# Altium PCB Power PCB Ver A.PcbDoc
Units mil, origin at the board's own origin, x right, y up, seen from the top; angles counter-clockwise.
Board outline 2927.17 x 2865.35 mil, 2 copper layers (Top Copper, Bottom Copper), stack 61.7 mil thick; 38 components, 30 nets, 129 pads, 104 vias.
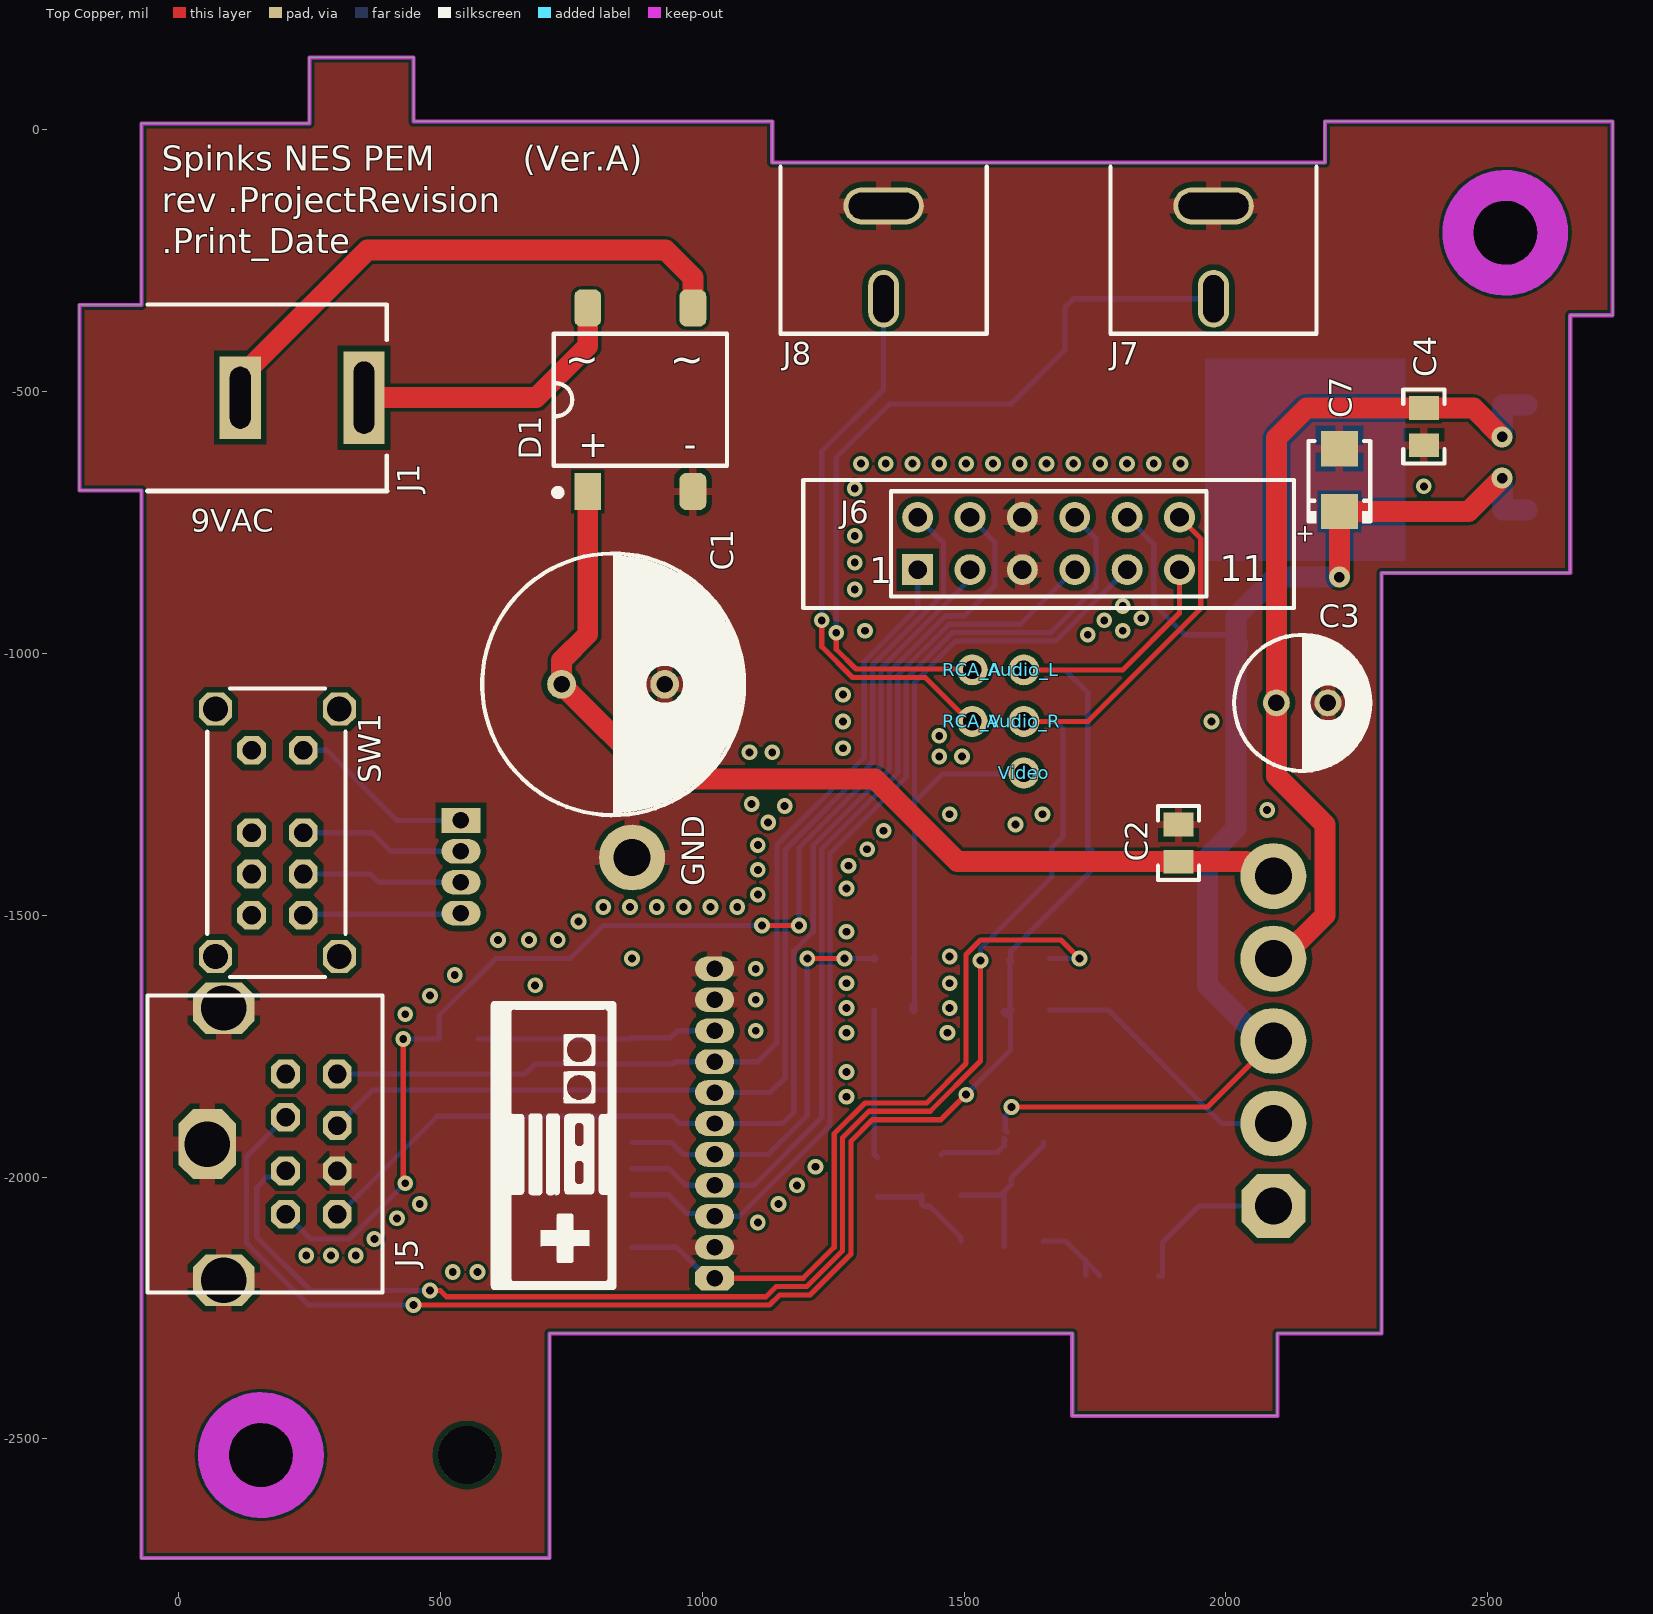
[diagram p0: Top Copper view]
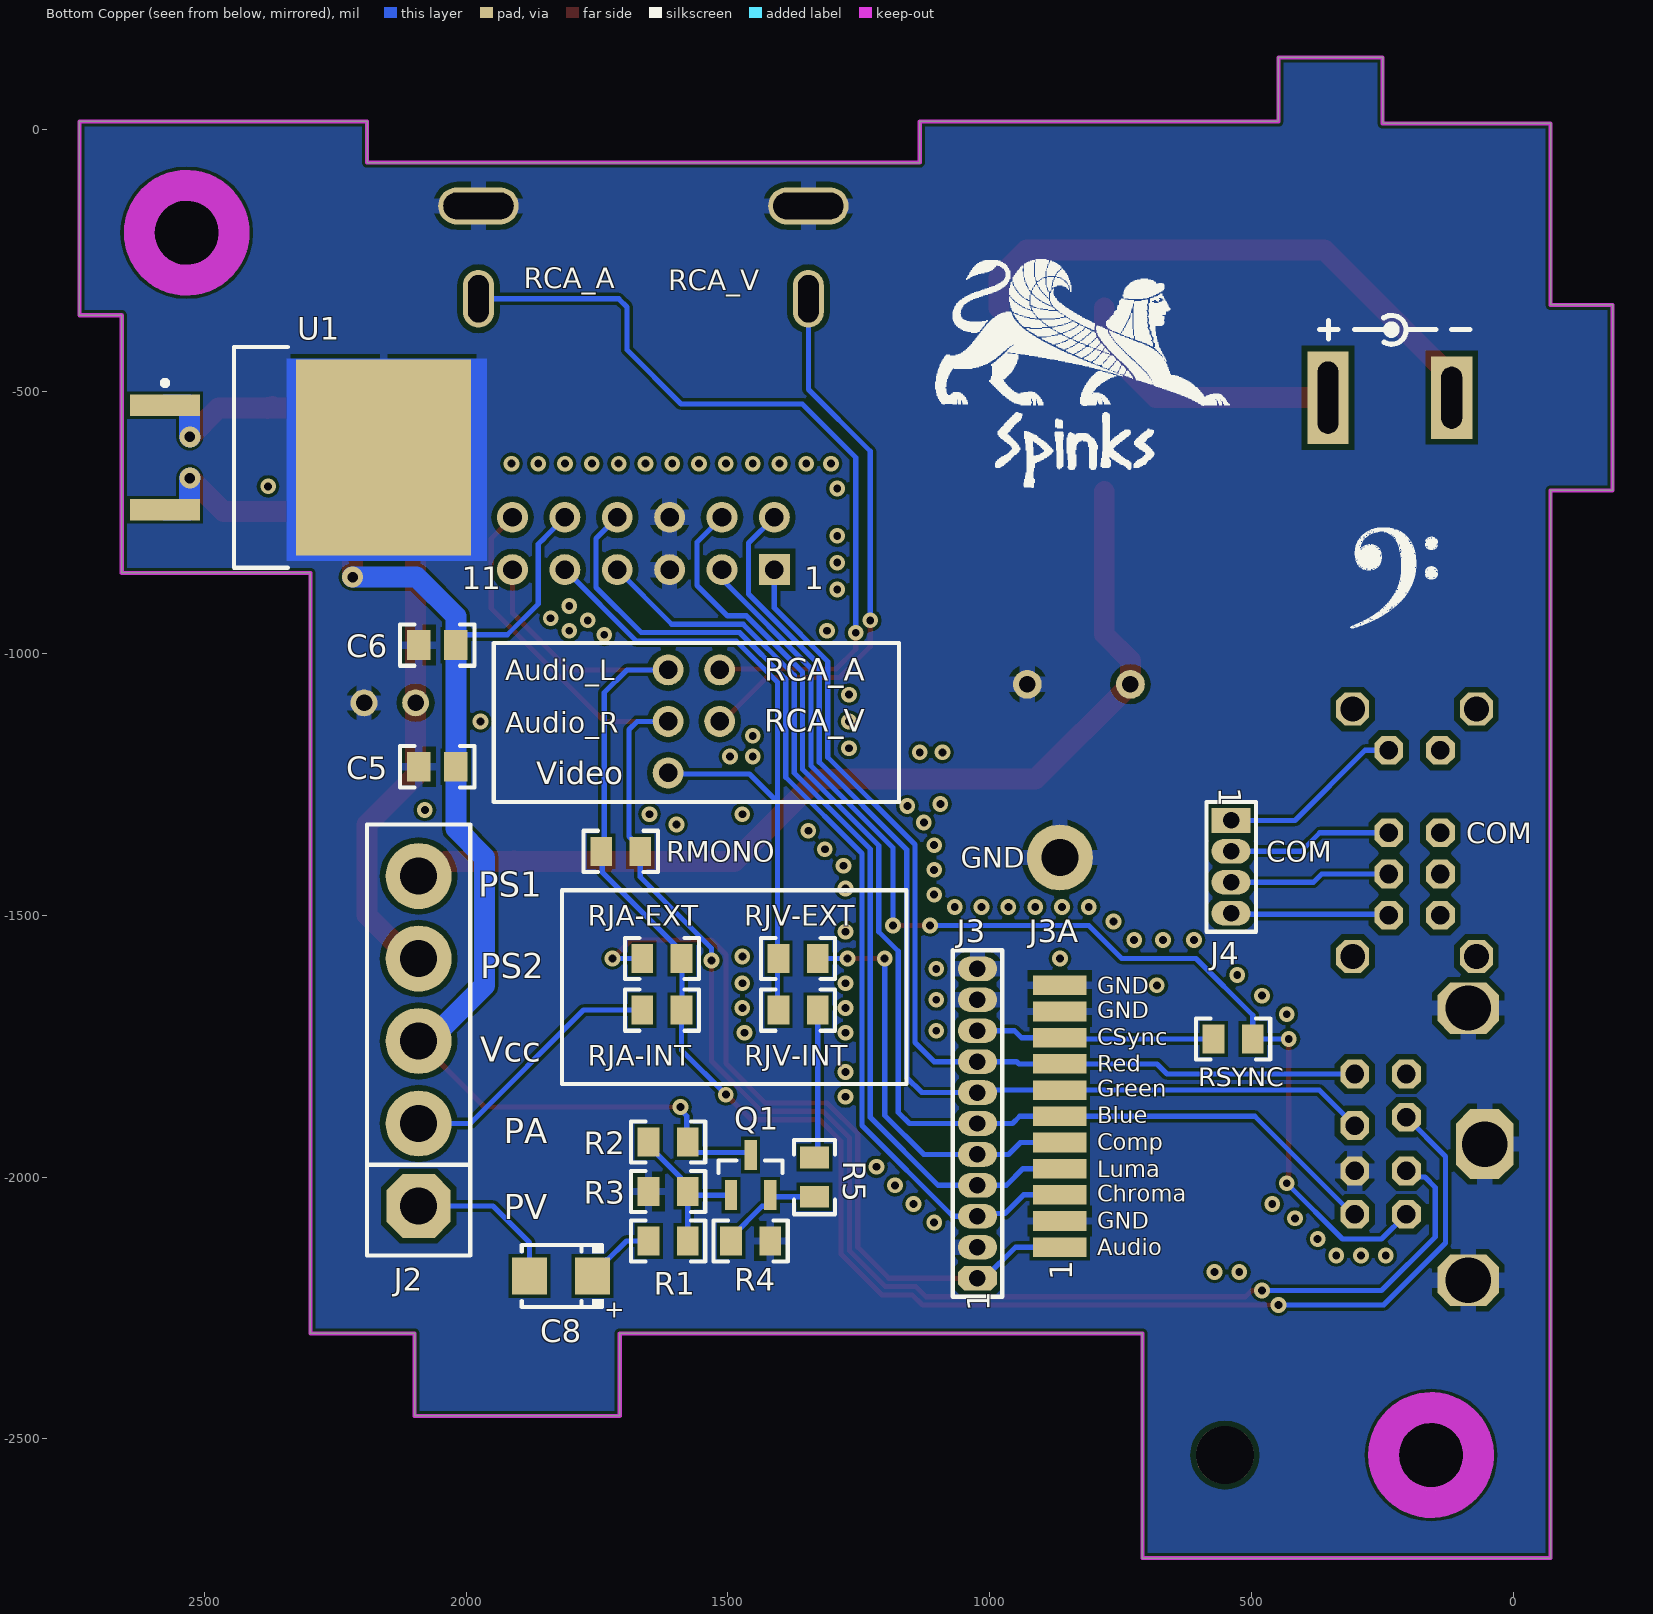
[diagram p1: Bottom Copper view, seen from below]
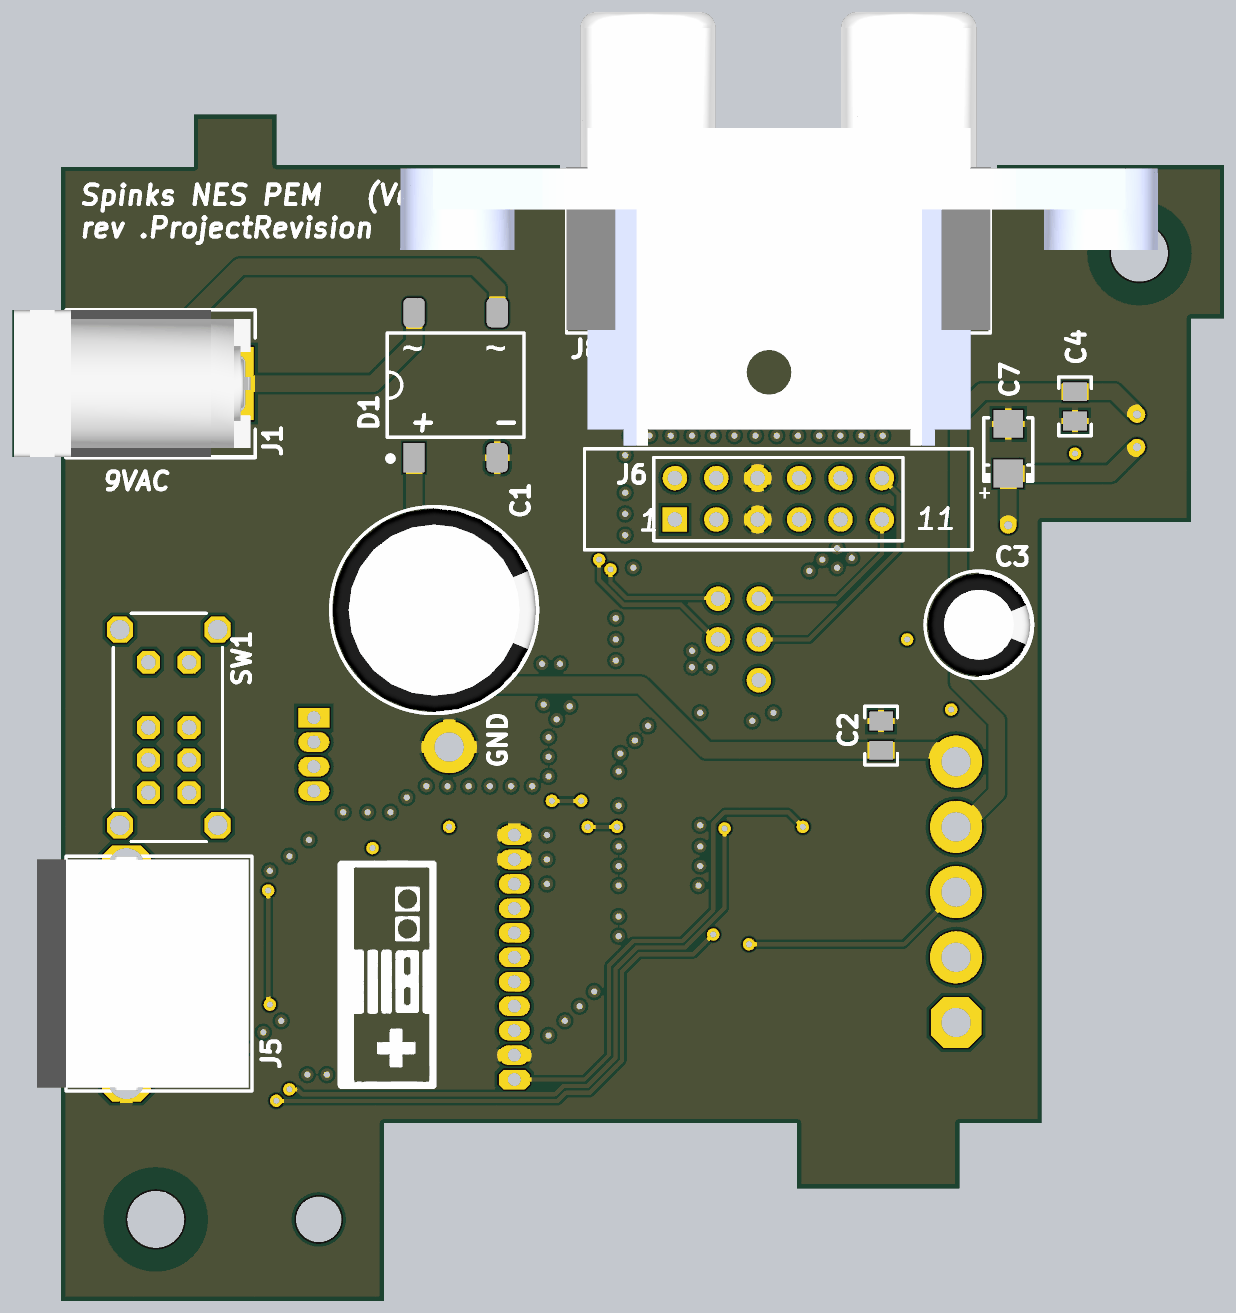
[diagram p2: 3D render of the assembled board from above, using the file's embedded part models]
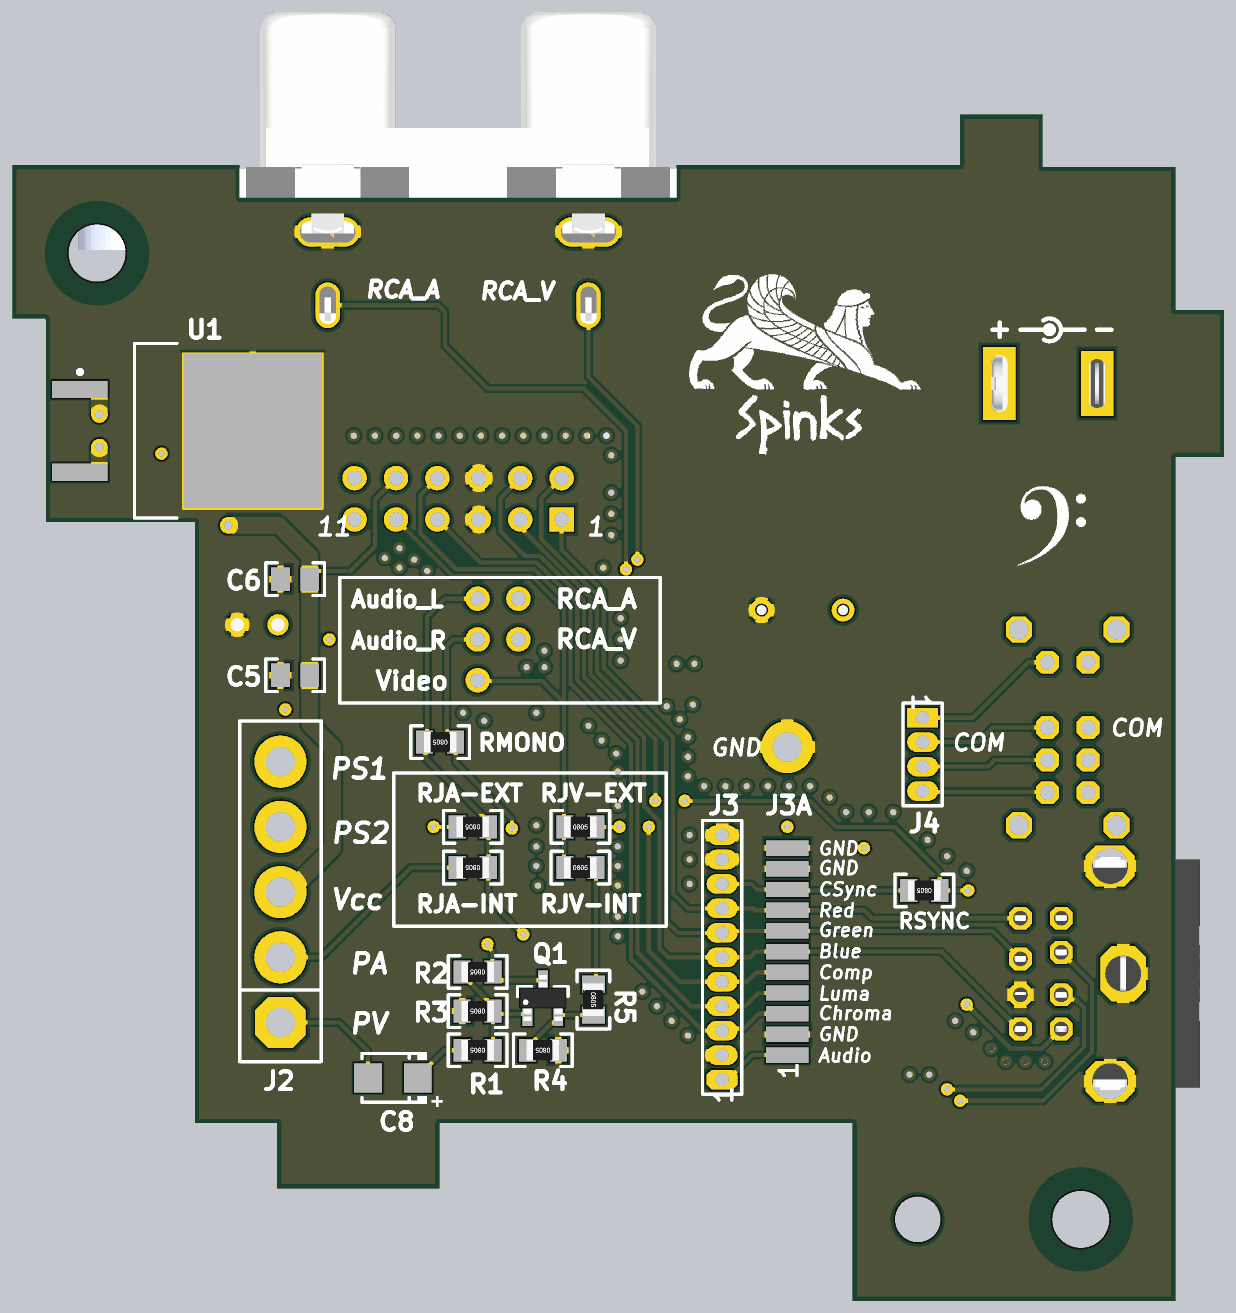
[diagram p3: 3D render of the assembled board from below, using the file's embedded part models]

## Layer stack, top to bottom
Top Solder Mask: solder mask 0.4, Solder Resist, Dk 3.5
Top Copper: signal copper 1.35
Dielectric 1: core 59, FR-4, Dk 4.2
Bottom Copper: signal copper 1.35
Bottom Solder Mask: solder mask 0.4, Solder Resist, Dk 3.5

## Board outline
-188.98,-688.98 -70.87,-688.98 -70.87,-2727.56 708.66,-2727.56 708.66,-2298.43 1706.69,-2298.43 1706.69,-2455.91 2098.43,-2455.91 2098.43,-2298.43 2297.24,-2298.43 2297.24,-846.46 2657.48,-846.46 2657.48,-354.33 2738.19,-354.33 2738.19,15.75 2188.98,15.75 2188.98,-62.99 1133.86,-62.99 1133.86,15.75 448.82,15.75 448.82,137.8 250,137.8 250,11.81 -70.87,11.81 -70.87,-334.65 -188.98,-334.65

## Design rules (kind name [scope] priority, off if disabled: settings)
Clearance [All] p1: gap=6 ignorepadtopadclearanceinfootprint=FALSE except(0: Arc-Hole Track-Hole SMDPad-Hole THPad-Hole Via-Hole Fill-Hole Poly-Hole Region-Hole Text-Hole; 10.5: THPad-Poly THPad-Region)
HoleSize [All] p1: absolutevalues=TRUE maxlimit=100 minlimit=15 maxpercent=80.000 minpercent=20.000
MinimumAnnularRing Via [IsVia] p1: minimumring=5
MinimumAnnularRing "Through Hole" [All] p2: minimumring=7
PolygonConnect "Via To Polygon" [IsVia] p1: connectstyle=Direct reliefconductorwidth=10 reliefentries=4 polygonreliefangle="90 Angle" airgapwidth=10
PolygonConnect "Pad to Polygon" [IsPad AND NOT OnMultiLayer] p2: connectstyle=Relief reliefconductorwidth=15 reliefentries=4 polygonreliefangle="90 Angle" airgapwidth=10
PolygonConnect "Through Hole to Polygon" [IsPad AND OnMultiLayer] p3: connectstyle=Relief reliefconductorwidth=30 reliefentries=4 polygonreliefangle="90 Angle" airgapwidth=10
PolygonConnect [All] p4: connectstyle=Relief reliefconductorwidth=15 reliefentries=4 polygonreliefangle="90 Angle" airgapwidth=10
RoomDefinition "Power Board Schematic Ver A" [InComponentClass('Power Board Schematic Ver A')] p1: confinementstyle=ConfineIn formatcopy=TRUE lockcomponents=FALSE outline -1000,-3727.56 1000,-3727.56 1000,-2727.56 -1000,-2727.56
RoutingVias [All] p1: holewidth=15 width=30 viastyle="Through Hole" minholewidth=15 minwidth=25 maxholewidth=40 maxwidth=64
SilkToSilkClearance [All] p1: silktosilkclearance=1
SolderMaskExpansion [All] p1: expansion=4 istentingtop=FALSE
Width [All] p1: maxlimit=200 minlimit=6 preferedwidth=10
28 further rules are at their usual default settings.

## Components (designator, comment, footprint, x,y, rotation, side; value= is the part's Value field where it differs from the comment)
Audio_L "Wire Pad" WIREPAD-09-15#1 1614.17,-1031.5 r180 top
Audio_R "Wire Pad" WIREPAD-09-15#1 1614.17,-1129.92 r90 top
C1 "Cap Aluminum" "TH CAP-12.5X25MM-A1K2" 830,-1059.06 r0 top value=2200uF
C2 "Cap Ceramic" "CAP 0805_N" 1909.45,-1362.2 r270 top value=10nF
C3 "Cap Aluminum" "TH CAP-6.3X11MM-A1K2" 2145.67,-1094.49 r0 top value=100uF
C4 "Cap Ceramic" "CAP 0805_N" 2377.95,-566.93 r90 top value=10nF
C5 "Cap Ceramic" "CAP 0805_N" 2055.12,-1216.54 r180 bottom value=10nF
C6 "Cap Ceramic" "CAP 0805_N" 2055.12,-984.25 r180 bottom value=0.1uF
C7 "Cap Tantalum" "CAP EIA-A (3216) A1K2" 2216.54,-669.29 r90 top value=10uF
C8 "Cap Tantalum" "CAP EIA-A (3216) A1K2" 1818.9,-2188.98 r0 bottom value=10uF
D1 "DF206-ST" DFS4 881.89,-515.75 r90 top
GND "Wire Pad" WIREPAD-09-15#2 866.14,-1389.76 r90 top
J1 "PJ-037A" "PWR-JCK (PJ-037A/B)" 118.11,-511.81 r0 top locked
J2 "RF Board Connector" "RF BOARD CONNECTOR" 2090.55,-2055.12 r90 bottom locked
J3 "1.27mm Pitch" "HDR1x11-15MM VERTL - L" 1023.62,-2192.91 r90 bottom
J3A "1.27mm Pitch" SMD1x11-127MM 866.14,-2133.86 r90 bottom
J4 "Header 1x4 1.27mm" "HDR1X4-15MM VERT - L" 539.37,-1318.9 r270 bottom
J5 "MD-80SM" "MINI-DIN-8-ALT (MD-80SM)" -129.92,-1937.01 r90 top locked
J6 "Multiout" MULTIOUT-2 1661.42,-653.54 r180 top locked
J7 "RCJ-042" "RCA-JCK-1 (RCJ-042)" 1976.38,-145.67 r180 top locked
J8 "RCJ-042" "RCA-JCK-1 (RCJ-042)" 1346.46,-145.67 r180 top locked
Q1 "Transistor NPN" SOT23-3 1456.69,-1996.06 r90 bottom value=BC817
R1 "Resistor" "RES 0805_N" 1614.17,-2122.05 r0 bottom value=330
R2 "Resistor" "RES 0805_N" 1614.17,-1933.07 r0 bottom value=5.6k
R3 "Resistor" "RES 0805_N" 1614.17,-2027.56 r0 bottom value=330
R4 "Resistor" "RES 0805_N" 1456.69,-2122.05 r0 bottom value=560
R5 "Resistor" "RES 0805_N" 1334.65,-2000 r270 bottom value=75
RCA_A "Wire Pad" WIREPAD-09-15#1 1515.75,-1031.5 r180 top
RCA_V "Wire Pad" WIREPAD-09-15#1 1515.75,-1129.92 r180 top
RJA-EXT "Resistor" "RES 0805_N" 1625.98,-1582.68 r0 bottom value=NA
RJA-INT "Resistor" "RES 0805_N" 1625.98,-1681.1 r0 bottom value=0
RJV-EXT "Resistor" "RES 0805_N" 1366.14,-1582.68 r180 bottom value=NA
RJV-INT "Resistor" "RES 0805_N" 1366.14,-1681.1 r180 bottom value=0
RMONO "Resistor" "RES 0805_N" 1704.72,-1377.95 r0 bottom value=0
RSYNC "Resistor" "RES 0805_N" 535.43,-1736.22 r0 bottom value=470
SW1 "DP3T" "SW-DP3T (EG2319)" 188.98,-1342.52 r270 top locked value=EG2319
U1 "L7805ABD2T" "D2PAK (TO-263)" 2318.9,-625.98 r180 bottom
Video "Wire Pad" WIREPAD-09-15#1 1614.17,-1228.35 r180 top

## Footprints (in the part's own frame and the unit in brackets; to place one, negate y for a bottom-side part, rotate by r counter-clockwise, add the part's x,y. Pads: shape width x height; smd on the part's side, far side on the other; paste and mask are expansions set on the pad)
"CAP 0805_N" [mm] "Chip Capacitor, Body 2.0x1.2mm, Height 0.75mm, IPC Medium Density"
  rect 1.15x1.45 smd: 1(-0.9,0) 2(0.9,0)
  silkscreen extent -1.8,-1 1.8,1, body extent -1.1,-0.72 1.1,0.73, height 0.75
"CAP EIA-A (3216) A1K2" [mm] "Molded Capacitor, 2-Leads, Body 3.20x1.60mm, IPC Medium Density"
  rect 1.7x1.8 smd: 1(-1.525,0) 2(1.525,0)
  silkscreen extent -2.1,-1.5 1.9,1.5, body extent -1.7,-0.9 1.7,0.9, height 1.9
"D2PAK (TO-263)" [mm] "D2-PAK, 3-Leads, Body 8.9x10.2mm, 3 Pads, Pitch 2.54mm, Lead Span 15.2mm, IPC Medium Density"
  rect 3.4x1.05 smd: 1(-6.5,2.54) 3(-6.5,-2.54)
  rect 8.5x9.5 smd: 4(4.1,0)
  silkscreen extent -6.63,-5.35 -0.55,5.35, body extent -3.15,-5.33 6.5,5.33, height 4.83
DFS4 [mm]
  rect 1.8x1.3 smd: 1(-4.45,2.55)
  rrect50% 1.8x1.3 smd: 2(-4.45,-2.55) 3(4.45,-2.55) 4(4.45,2.55)
  silkscreen extent -4.62,-4.2 3.2,4.2, body extent -3.25,-4.25 3.25,4.25, height 2.6
"HDR1X4-15MM VERT - L" [mm] "Connector; Header; 4 Position; 1.5mm Pitch;Vertical Mount"
  rect 1.2x1.9 hole 0.8: 1(0,0)
  oval 1.2x1.9 hole 0.8: 2(1.5,0) 3(3,0) 4(4.5,0)
  silkscreen extent -0.9,-1.2 5.4,1.2
"HDR1x11-15MM VERTL - L" [mm] "Connector; Header; 11 Position; 1.5mm Pitch"
  oct 1.2x1.9 hole 0.8: 1(0,0)
  oval 1.2x1.9 hole 0.8: 2(1.5,0) 3(3,0) 4(4.5,0) 5(6,0) 6(7.5,0) 7(9,0) 8(10.5,0) 9(12,0) 10(13.5,0) 11(15,0)
  silkscreen extent -0.9,-1.2 15.9,1.2
"MINI-DIN-8-ALT (MD-80SM)" [mm] "CUI Inc, Mini Din Connector, Through Hole, Right Angle"
  oct 1.4x1.4 hole 0.9: 1(-1.3,-8.5) 2(1.3,-8.5) 3(-3.4,-8.5) 4(-1.3,-11) 5(3.4,-8.5) 6(-3.4,-11) 7(0.9,-11) 8(3.4,-11)
  oct 2.5x3 hole 2.2: SHLD(-6.6,-5.5) SHLD(6.6,-5.5)
  oct 3.4x2.8 hole 2.2: SHLD(0,-4.7)
  silkscreen extent -7.2,-13.2 7.2,-1.8, body extent -7.17,-13 7.17,0, height 12.8
MULTIOUT-2 [mm] "Retrofixes Mutliout Connector, Panel Mount with Through Holes"
  rect 1.5x1.5 hole 0.9 paste+0: 1(6.35,4.74)
  round 1.5 hole 0.9 paste+0: 2(6.35,2.2) 3(3.81,4.74) 4(3.81,2.2) 5(1.27,4.74) 6(1.27,2.2) 7(-1.27,4.74) 8(-1.27,2.2) 9(-3.81,4.74) 10(-3.81,2.2) 11(-6.35,4.74) 12(-6.35,2.2)
  silkscreen extent -11.9,0.4 11.9,6.6, body extent -23.3,-19.29 23.2,0.21, height 14.55
"PWR-JCK (PJ-037A/B)" [mm] "DC Power Jack; 2.1mm ID, 6.5mm OD; No Switch"
  rect 2x4.5 hole 1 slot 3.5 at 90 deg: 1(6,0)
  rect 2x4 hole 1 slot 3 at 90 deg: 2(0,0)
  body extent -7.7,-4.5 6.8,4.5, height 11.02
"RCA-JCK-1 (RCJ-042)" [mm] "RCA Phono Jack, Right Angle"
  oval 3.9x1.8 hole 1.3 slot 3.4 at 0 deg: 1(0,0)
  oval 1.5x2.8 hole 1 slot 2.3 at 90 deg: 2(0,4.5)
  silkscreen extent -5,-1.9 5,6.2, body extent -5,-13.5 5,6, height 11.51
"RES 0805_N" [mm] "Chip Resistor, Body 2.0x1.3mm, IPC Medium Density"
  rect 1.05x1.4 smd: 1(-0.95,0) 2(0.95,0)
  silkscreen extent -1.8,-1 1.8,1, body extent -1,-0.62 1,0.63, height 0.62
"RF BOARD CONNECTOR" [mm] "connects the motherboard to the RF/power box"
  oct 3.1x3.1 hole 1.8 paste+0: 1(0,0)
  round 3.2 hole 1.8 paste+0: 2(4,0) 3(8,0) 4(12,0) 5(16,0)
  silkscreen extent -2.4,-2.5 18.5,2.5
SMD1x11-127MM [mm] "Connector; Header; 11 Position; 1.27mm Pitch"
  rect 0.95x2.6 smd: 1(0,0) 2(1.27,0) 3(2.54,0) 4(3.81,0) 5(5.08,0) 6(6.35,0) 7(7.62,0) 8(8.89,0) 9(10.16,0) 10(11.43,0) 11(12.7,0)
SOT23-3 [mm] "SOT23, 3-Leads, Body 2.90x2.35mm, Pitch 0.95mm, IPC Medium Density"
  rect 1.45x0.6 smd: 1(-0.975,0.95) 2(-0.975,-0.95) 3(0.975,0)
  silkscreen extent 0.1,-1.55 0.7,1.55, body extent -1.4,-1.45 1.4,1.45, height 1.3
"SW-DP3T (EG2319)" [mm] "E-Switch; DP3T Slide Switch; PCB Mount Right Angle"
  oct 1.4x1.4 hole 0.9: 1(-4,-1.25)
  oct 1.4x1.4 hole 0.9 paste+0: 2(0,-1.25) 3(2,-1.25) 4(4,-1.25) 5(-4,1.25) 6(0,1.25) 7(2,1.25) 8(4,1.25)
  oct 1.6x1.6 hole 1.2: MH(-6,3) MH(-6,-3) MH(6,3) MH(6,-3)
  silkscreen extent -7,-3.4 7,3.3, body extent -6.9,-11.75 6.9,3.25, height 8.5
"TH CAP-6.3X11MM-A1K2" [mm] "Aluminum Electrolytic Capacitor, Diameter 6.3mm, Height 11mm, Pitch 2.5mm"
  round 1.3 hole 0.8: 1(-1.25,0) 2(1.25,0)
  silkscreen extent -3.3,-3.3 3.3,3.3, body extent -3.15,-3.15 3.16,3.15, height 11.21
"TH CAP-12.5X25MM-A1K2" [mm] "Aluminum Electrolytic Capacitor, Diameter 12.5mm, Height 25mm, Pitch 5.0mm"
  round 1.4 hole 0.8: 1(-2.5,0) 2(2.5,0)
  silkscreen extent -6.35,-6.35 6.35,6.35, body extent -6.25,-6.25 6.26,6.25, height 25.01
WIREPAD-09-15#1 [mm] "Connector; Through Hole Pad; 0.9mm Inner, 1.5mm Outer"
  round 1.5 hole 0.9: 1(0,0)
WIREPAD-09-15#2 [mm] "Connector; Through Hole Pad; 0.9mm Inner, 1.5mm Outer"
  round 3.2 hole 1.8: 1(0,0)

## Part data
Audio_L Audio_R GND RCA_A RCA_V Video: library part "-Wire Pad", "Wire Pad, 1 Pin, Through Hole, Vertical"
C1: library part "TH-ALUM-8-22-25V (ECA-1EHG222)", "CAP, ALUM, TH, 12.5x25mm, 2200uF, 25V, 20%, Pitch 5.0mm", Supplier Part Number 1=667-ECA-1EHG222, Voltage=25V, ReferencePart=ECA-1EHG222, Supplier 1=Mouser
C2 C4 C5: library part 0603-X7R-3-10-50V, "CAP, CER, 0805, 10nF, 50V, X7R, 10%", Voltage=50V, ReferencePart=VJ0603Y103KXACW1BC
C3: library part "TH-ALUM-7-10-25V (ECA-1EM101)", "CAP, ALUM, TH, 6.3x11mm, 100uF, 25V, 20%, Pitch 2.5mm", Supplier Part Number 1=667-ECA-1EM101, Voltage=25V, ReferencePart=ECA-1EM101, Supplier 1=Mouser
C6: library part 0805-X7R-4-10-50V, "CAP, CER, 0805, 0.1uF, 50V, X7R, 10%", Voltage=50V, ReferencePart=VJ0805Y104KXXCW1BC
C7 C8: library part "1206-TANT-6-10-16V (TAJA106K016RNJ)", "CAP, TANT,  1206, 10uF, 16V, 10%", Supplier Part Number 1=581-TAJA106K016R, Voltage=16V, Supplier 1=Mouser
D1: library part "Bridge (DF206-ST)", "Full Wave Diode Bridge", Supplier Part Number 1=750-DF206ST-G, Supplier 1=Mouser
J1: library part "PWR-JCK (PJ-037A)", "2.1mm ID, DC Power Supply Connector, 2 Pin", Supplier Part Number 1=490-PJ-037A, Supplier 1=Mouser
J2: "Motherboard Connector to RF/Power Module"
J3: library part "RF Board Mod Input Header", "Video and audio inputs for the RF Board Mod"
J3A: library part "RF Board Mod Input Header_1", "Video and audio inputs for the RF Board Mod"
J4: library part "Header 1x4 - 1.5mm Vert", "Header, 4 Pin, 1.5mm Pitch, Vertical"
J5: library part "Mini-XRGB (MD-80SM)", "8 Pin Mini DIN Connector, Shielded, Through Hole, Right Angle", Supplier Part Number 1=490-MD-80SM, Supplier 1=Mouser
J6: library part "Multiout Connector", "SNES Multiout Connector"
J7 J8: library part "RCA-JCK-1 (RCJ-042)", "RCA Phono Jack, Right Angle", Supplier Part Number 1=490-RCJ-042, Supplier 1=Mouser
Q1: library part "BC817 NPN", "General Purpose Transistor, NPN, 3-Pin, B1E2C3", Supplier Part Number 1=863-BC817-40LT1G, Supplier 1=Mouser
R1 R2 R3 R4 R5 RJA-EXT RJA-INT RJV-EXT RJV-INT RMONO RSYNC: library part -Resistor, "RES, SMD"
SW1: library part "SW-DP3T (EG2319)", "Dual Pole, Three Throw", Supplier Part Number 1=612-EG2319, Supplier 1=Mouser
U1: "Fixed 5V Regulator, 1.5A, D2PAK", Supplier Part Number 1=511-L7805ABD2T-TR, Supplier 1=Mouser

## Free pads (board coordinates)
  round 137.8 hole 137.8 unplated paste+0: MH(157.48,-2530.71) MH(2533.46,-196.85)
  round 110.24 hole 110.24 unplated paste+0: MH(551.18,-2530.71)

## Via types
v1: diameter 30, hole 15, Top Copper to Bottom Copper, tented both sides, 82 vias
v2: diameter 30, hole 15, Top Copper to Bottom Copper, 19 vias
v3: diameter 40, hole 20, Top Copper to Bottom Copper, 3 vias

## Nets (pads, with @x,y where several pads share a name; then routed paths per layer and width w, separated by ;. In a path a pad name is that pad's centre, name@x,y a point inside that pad or via, vN(x,y) a via of type N, cw(c..) or ccw(c..) an arc to the next point about the centre after c; other vN are vias at no path point)
+5V: C5.2 C6.2 C7.1 J2.3 J6.10 Q1.3 R2.1 U1.3 | length 2877.6
  Top Copper w10: v2(1590.55,-1866.14) 1964.57,-1866.14 J2.3
  Top Copper w15: C7.1@2218.5,-729.33 C7.1@2244.47,-703.37
  Top Copper w20: J6.10 J6.10@1811.42,-728.58
  Top Copper w40: v3(2216.54,-854.33) C7.1 2218.5,-729.33 2463.58,-729.33 v3(2527.56,-665.35)
  Bottom Copper w10: Q1.3 1456.69,-1957.44 1461,-1953.13 1563.6,-1953.13 1576.77,-1939.96 R2.1 ; R2.1@1576.77,-1926.18 R2.1 ; R2.1@1578.74,-1931.1 R2.1 ; R2.1@1582.68,-1913.39 1581.61,-1913.39 1578.74,-1910.51 1578.74,-1883.36 1590.55,-1871.55 v2(1590.55,-1866.14) ; J6.10 1850.39,-779.13 1850.39,-779.53 1862.2,-791.34 1862.2,-905.51 1921.26,-964.57 C6.2@2003.94,-964.57
  Bottom Copper w15: J6.10@1811.02,-724.41 1811.02,-739.76 J6.10 ; J2.3@2086.61,-1744.09 J2.3
  Bottom Copper w40: C5.2@2019.69,-1240.16 2019.69,-1334.65 1964.57,-1389.76 1964.57,-1633.86 2070.87,-1740.16 J2.3 ; C5.2@2019.69,-1236.22 C6.2@2019.69,-988.19 ; C6.2@2022.32,-981.61 2022.32,-985.55 C6.2@2019.69,-988.19 ; J2.3@2086.61,-1744.09 J2.3@2090.55,-1748.03 ; v3(2216.54,-854.33) 2094.49,-854.33 2019.69,-929.13 C6.2 C6.2@2019.69,-988.19 ; v3(2527.56,-665.35) 2527.87,-665.67 2527.87,-725.32 2528.54,-725.98 U1.3
"AUDIO LEFT": Audio_L.1 J5.2 J6.11 RJA-EXT.1 RJA-INT.1 RMONO.2 | length 3436.6
  Top Copper w10: v2(448.82,-2244.09) 449.07,-2244.35 1128.67,-2244.35 1148.11,-2224.91 1206.17,-2224.91 1283.97,-2147.11 1283.97,-1931.57 1325.27,-1890.27 1456.19,-1890.27 v2(1503.94,-1842.52) ; Audio_L.1 1803.15,-1031.5 1911.42,-923.23 J6.11
  Bottom Copper w10: J5.2 129.92,-1960.63 129.92,-2125.98 248.03,-2244.09 v2(448.82,-2244.09) ; v2(1503.94,-1842.52) 1588.58,-1757.87 RJA-INT.1 1587.6,-1680.12 RJA-EXT.1@1587.6,-1586.54 ; RJA-EXT.1 1588.58,-1568.9 1740.16,-1417.32 1740.16,-1379.92 RMONO.2 1736.22,-1372.05 1736.22,-1074.8 1692.91,-1031.5 Audio_L.1
  Bottom Copper w15: RJA-INT.1@1576.97,-1684.84 1580.91,-1688.78 RJA-INT.1 ; RJA-EXT.1@1587.6,-1586.54 RJA-EXT.1@1588.58,-1587.52 ; RMONO.2 RMONO.2@1743.11,-1378.94
"AUDIO RIGHT": Audio_R.1 J5.1 J6.12 RMONO.1 | length 3301.6
  Top Copper w10: v2(480.32,-2216.54) 500,-2216.54 511.81,-2228.35 1122.05,-2228.35 1141.48,-2208.91 1199.54,-2208.91 1267.97,-2140.49 1267.97,-1924.94 1318.65,-1874.27 1435.42,-1874.27 1531.5,-1778.19 v2(1531.5,-1586.61) ; Audio_R.1 1736.22,-1129.92 1951.94,-914.2 1951.94,-780.68 J6.12
  Bottom Copper w10: J5.1 193.02,-1999.9 169.39,-1999.9 149.61,-2019.69 149.61,-2114.17 251.97,-2216.54 v2(480.32,-2216.54) ; v2(1531.5,-1586.61) 1531.5,-1562.99 1667.32,-1427.17 RMONO.1 1667.32,-1371.06 1688.98,-1349.41 1688.98,-1145.67 1673.23,-1129.92 Audio_R.1
BLUE: J3.6 J3A.6 J5.6 J6.4 | length 2322.1
  Top Copper w15: J6.4@1511.42,-726.42 J6.4 J6.4@1519.68,-740.16
  Bottom Copper w10: J5.6 307.09,-2070.87 494.09,-1883.86 J3A.6 942.91,-1883.86 956.69,-1897.64 J3.6 1153.54,-1897.64 1174.79,-1876.39 1174.79,-1568.8 1212.09,-1531.5 1212.09,-1366.65 1357.51,-1221.23 1357.51,-1035.24 1464.37,-928.38 1500.76,-928.38 1559.06,-870.08 1559.06,-787.8 J6.4
CHROMA: J3.3 J3A.3 J6.8 | length 1965.3
  Bottom Copper w10: J3A.3 935.43,-2033.86 971.22,-2069.65 1018.46,-2069.65 J3.3 1070.87,-2074.8 1244.09,-1901.57 1244.09,-1381.89 1389.51,-1236.47 1389.51,-1048.49 1477.62,-960.38 1665.61,-960.38 1751.94,-874.04 1751.94,-780.68 J6.8
CSYNC: J5.3 J6.3 RSYNC.1 | length 2256
  Top Copper w10: v2(429.13,-1736.22) 429.13,-2007.87 v2(433.07,-2011.81) ; v2(1114.17,-1519.69) v2(1185.04,-1519.69)
  Bottom Copper w10: J5.3 251.97,-2118.11 326.77,-2118.11 v2(433.07,-2011.81) ; v2(429.13,-1736.22) RSYNC.1 498.03,-1690.94 606.3,-1582.68 748.03,-1582.68 811.02,-1519.69 v2(1114.17,-1519.69) ; v2(1185.04,-1519.69) 1185.04,-1371.07 1341.51,-1214.6 1341.51,-1028.61 1503.94,-866.18 1503.94,-847.64 J6.3
GND: C1.2 C2.1 C3.2 C4.1 C5.1 C6.1 C7.2 D1.2 GND.1 J3.2 J3.10 J3.11 J3A.2 J3A.10 J3A.11 J5.4 J5.SHLD J6.5 J6.6 J7.1 J8.1 R3.2 R4.1 U1.4 | length 2.2
  Bottom Copper w40: U1.4@2218.9,-625.98 U1.4@2220.47,-624.41
GREEN: J3.7 J3A.7 J5.7 J6.2 | length 2126.3
  Top Copper w15: J6.2 J6.2@1425.2,-740.16
  Bottom Copper w10: J5.7 370.87,-1833.86 J3A.7 1018.9,-1833.86 J3.7 1129.81,-1838.58 1158.79,-1809.6 1158.79,-1374.7 1325.51,-1207.97 1325.51,-1021.98 1460.63,-886.86 1460.63,-789.37 J6.2
LUMA: J3.4 J3A.4 J6.7 | length 1754.8
  Bottom Copper w10: J3A.4 936.61,-1983.86 968.5,-2015.75 J3.4 1098.43,-2015.75 1228.09,-1886.08 1228.09,-1374.02 1373.51,-1228.6 1373.51,-1041.86 1471,-944.38 1607.2,-944.38 J6.7
NetC1_1: C1.1 C2.2 D1.1 J2.5 | length 1900.8
  Top Copper w40: D1.1 781.5,-963.5 731.57,-1013.43 C1.1 912.52,-1240 1330,-1240 1487.64,-1397.64 C2.2 ; C2.2@1908.46,-1396.65 C2.2 ; J2.5 2067.28,-1425.2 2039.72,-1397.64 C2.2
NetC3_1: C3.1 C4.2 J2.4 U1.1 | length 1678.3
  Top Copper w40: J2.4@2086.65,-1590.55 J2.4@2090.55,-1590.55 ; J2.4 2106.3,-1582.68 2188.98,-1500 2188.98,-1326.77 2096.46,-1234.25 C3.1 2096.46,-588.58 2153.54,-531.5 C4.2@2372.05,-531.5 ; C4.2@2369.41,-528.86 C4.2@2372.05,-531.5 ; C4.2@2379.13,-532.68 C4.2 ; C4.2@2379.13,-530.32 C4.2 ; v3(2527.56,-586.61) 2472.44,-531.5 C4.2 ; C4.2@2372.05,-531.5 C4.2
  Bottom Copper w40: v3(2527.56,-586.61) 2527.87,-586.3 2527.87,-526.65 2528.54,-525.98 U1.1
NetC8_1: C8.1 R1.2 | length 166.7
  Bottom Copper w10: R1.2 1693.9,-2122.05 C8.1@1732.28,-2160.43 ; C8.1@1732.28,-2187.99 C8.1@1732.28,-2160.43 ; C8.1@1732.28,-2157.48 C8.1@1732.28,-2160.43 ; C8.1 1758.86,-2187.01 C8.1@1732.28,-2160.43
NetC8_2: C8.2 J2.1 | length 312.4
  Bottom Copper w10: C8.2@1871.06,-2188.98 C8.2 1878.94,-2125 1948.82,-2055.12 J2.1
NetD1_3: D1.3 J1.2 | length 1079
  Top Copper w40: J1.2@129.92,-511.81 129.92,-460.63 360.55,-230 930,-230 982.28,-282.28 D1.3
NetD1_4: D1.4 J1.1 | length 529
  Top Copper w40: J1.1@366.14,-511.81 683.19,-511.81 781.5,-413.5 D1.4
NetJ2_2: J2.2 RJA-INT.2 | length 516.9
  Bottom Copper w10: RJA-INT.2 1775.59,-1681.1 1992.13,-1897.64 J2.2
NetJ3_1: J3.1 J3A.1 RJA-EXT.2 | length 1466.9
  Top Copper w10: J3.1 1192.91,-2192.91 1251.97,-2133.86 1251.97,-1917.32 1311.02,-1858.27 1428.79,-1858.27 1503.94,-1783.12 1503.94,-1574.8 1531.5,-1547.24 1685.04,-1547.24 v2(1720.47,-1582.68)
  Bottom Copper w10: J3A.1 950.79,-2133.86 1009.84,-2192.91 J3.1 ; RJA-EXT.2 v2(1720.47,-1582.68)
NetJ3_5: J3.5 J3A.5 RJV-EXT.2 | length 802.9
  Top Copper w10: v2(1200.79,-1582.68) v2(1271.65,-1582.68)
  Bottom Copper w10: J3A.5 941.73,-1933.86 964.57,-1956.69 J3.5 1125.98,-1956.69 1200.79,-1881.89 v2(1200.79,-1582.68) ; v2(1271.65,-1582.68) 1327.09,-1582.68 RJV-EXT.2@1327.91,-1583.5
  Bottom Copper w15: RJV-EXT.2@1327.91,-1583.5 RJV-EXT.2
NetJ3_9: J3.9 J3A.9 RSYNC.2 | length 457.3
  Bottom Copper w10: RSYNC.2 863.78,-1736.22 J3A.9 939.37,-1733.86 952.76,-1720.47 J3.9
NetJ4_1: J4.1 SW1.5 | length 368.4
  Bottom Copper w10: SW1.5 283.46,-1185.04 417.32,-1318.9 J4.1@551.18,-1318.9
NetJ4_2: J4.2 SW1.6 | length 327.7
  Bottom Copper w10: SW1.6 370.08,-1342.52 405.51,-1377.95 J4.2@551.18,-1377.95
NetJ4_3: J4.3 SW1.7 | length 319.5
  Bottom Copper w10: SW1.7 366.14,-1421.26 381.89,-1437.01 J4.3@551.18,-1437.01
NetJ4_4: J4.4 SW1.8 | length 314.6
  Bottom Copper w10: SW1.8 240.16,-1498.03 549.21,-1498.03 J4.4@551.18,-1496.06
NetJ7_1: J7.2 RCA_A.1 | length 1529.7
  Top Copper w10: v2(1255.91,-960.63) 1255.91,-992.13 1293.78,-1030 RCA_A.1@1509.89,-1030
  Bottom Copper w10: v2(1255.91,-960.63) 1255.91,-625.98 1358.27,-523.62 1589.56,-523.62 1692.91,-420.27 1692.91,-338.58 1708.66,-322.83 J7.2
NetJ8_1: J8.2 RCA_V.1 | length 999.8
  Top Copper w10: v2(1228.35,-937.01) 1228.35,-987.19 1287.15,-1046 1425.89,-1046 1498,-1118.11 RCA_V.1@1511.81,-1118.11
  Bottom Copper w10: v2(1228.35,-937.01) 1228.35,-614.17 1346.46,-496.06 J8.2@1346.46,-374.02
NetQ1_1: Q1.1 R1.1 R2.2 R3.1 | length 315.3
  Bottom Copper w10: Q1.1 1569.88,-2034.45 R3.1 ; R1.1@1576.77,-2131.89 R1.1 R3.1 ; R2.2 1651.57,-1939.96 1589.94,-2001.59 1589.94,-2014.39 R3.1
NetQ1_2: Q1.2 R4.2 R5.2 | length 211
  Bottom Copper w10: R5.2 1416.34,-2037.4 Q1.2 1419.29,-2051.18 1423.6,-2055.49 1434.43,-2055.49 1494.09,-2115.16 R4.2 R4.2@1493.94,-2122.2
NetR5_1: R5.1 RJV-INT.2 | length 283.9
  Bottom Copper w10: RJV-INT.2 1328.74,-1956.69 R5.1
RED: J3.8 J3A.8 J5.8 J6.1 | length 1878.7
  Bottom Copper w10: J5.8 661.42,-1803.15 680.71,-1783.86 J3A.8 944.49,-1783.86 948.82,-1779.53 J3.8 1106.3,-1779.53 1142.79,-1743.04 1142.79,-1365.09 1309.51,-1198.36 1309.51,-1015.35 1411.42,-913.45 J6.1
"VIDEO OUT": J6.9 RJV-EXT.1 RJV-INT.1 Video.1 | length 1359.8
  Bottom Copper w10: RJV-INT.1@1401.57,-1681.1 1403.54,-1679.13 1405.51,-1677.17 1405.51,-1584.65 RJV-EXT.1 1405.51,-1580.71 1405.51,-1283.46 ; Video.1@1610.17,-1230.19 1458.78,-1230.19 1405.51,-1283.46 ; J6.9 1675.2,-976.38 1484.25,-976.38 1405.51,-1055.12 1405.51,-1283.46
  Bottom Copper w15: RJV-INT.1 1403.54,-1679.13 RJV-INT.1@1403.54,-1672.2
pads on no net: J5.5 SW1.1 SW1.2 SW1.3 SW1.4 SW1.MH
copper on no net:
  other v1: 523.62,-2181.1 570.87,-2181.1 244.09,-2149.61 291.34,-2149.61 338.58,-2149.61 374.02,-2118.11 1106.3,-2086.61 417.32,-2078.74 460.63,-2051.18 1145.67,-2051.18 1181.1,-2015.75 1216.54,-1980.31 1275.59,-1846.46 1275.59,-1799.21 1275.59,-1724.41 1468.5,-1724.41 1102.36,-1720.47 433.07,-1688.98 1275.59,-1677.17 1472.44,-1677.17 1102.36,-1661.42 480.32,-1653.54 1275.59,-1629.92 1472.44,-1629.92 527.56,-1614.17 1102.36,-1602.36 1472.44,-1578.74 610.24,-1547.24 669.29,-1547.24 724.41,-1547.24 1275.59,-1531.5 763.78,-1511.81 811.02,-1484.25 862.2,-1484.25 913.39,-1484.25 964.57,-1484.25 1015.75,-1484.25 1066.93,-1484.25 1106.3,-1460.63 1275.59,-1448.82 1106.3,-1413.39 1279.53,-1405.51 1314.96,-1374.02 1106.3,-1366.14 1346.46,-1338.58 1598.43,-1326.77 1125.98,-1322.83 1472.44,-1307.09 1649.61,-1307.09 1157.48,-1291.34 1094.49,-1287.4 1452.76,-1196.85 1496.06,-1196.85 1090.55,-1188.98 1133.86,-1188.98 1268.71,-1181.1 1452.76,-1157.48 1268.71,-1129.92 1268.71,-1078.74 1736.22,-964.57 1311.02,-956.69 1803.15,-956.69 1767.72,-937.01 1838.58,-933.07 1803.15,-909.45 1291.34,-877.95 1291.34,-826.77 1291.34,-775.59 1291.34,-685.04 1303.15,-637.8 1350.39,-637.8 1401.57,-637.8 1452.76,-637.8 1503.94,-637.8 1555.12,-637.8 1606.3,-637.8 1657.48,-637.8 1708.66,-637.8 1759.84,-637.8 1811.02,-637.8 1862.2,-637.8 1913.39,-637.8
  other v2: 681.1,-1633.86 866.14,-1582.68 2078.74,-1299.21 1972.44,-1129.92 2377.95,-681.1

## Polygon pours and split planes (outlines as drawn)
GND on Top Copper "Top Ground Plane" (solid, pour order 2): -70.87,-2727.56 708.66,-2727.56 708.66,-2298.43 1706.69,-2298.43 1706.69,-2455.91 2098.43,-2455.91 2098.43,-2298.43 2297.24,-2298.43 2297.24,-846.46 2657.48,-846.46 2657.48,-354.33 2738.19,-354.33 2738.19,11.81 2188.98,15.75 2188.98,-62.99 1133.86,-62.99 1133.86,15.75 448.82,15.75 448.82,137.8 250,137.8 250,11.81 -70.87,11.81 -70.87,-334.65 -188.98,-334.65 -188.98,-688.98 -70.87,-688.98
GND on Bottom Copper "Bottom Ground Plane" (solid, pour order 4): -70.87,-2727.56 708.66,-2727.56 708.66,-2298.43 1706.69,-2298.43 1706.69,-2455.91 2098.43,-2455.91 2098.43,-2298.43 2297.24,-2298.43 2297.24,-846.46 2657.48,-846.46 2657.48,-354.33 2738.19,-354.33 2738.19,15.75 2188.98,15.75 2188.98,-62.99 1133.86,-62.99 1133.86,15.75 448.82,15.75 448.82,137.8 250,137.8 250,11.81 -70.87,11.81 -70.87,-334.65 -188.98,-334.65 -188.98,-688.98 -70.87,-688.98

## Keep-outs
Keep-Out Layer:
  circle w59.06: c157.48,-2530.71 r90.55
  circle w59.06: c2533.46,-196.85 r90.55
  lines w7.87: -188.98,-688.98 -188.98,-334.65 -70.87,-334.65 -70.87,11.81 250,11.81 250,137.8 448.82,137.8 448.82,15.75 1133.86,15.75 1133.86,-62.99 2188.98,-62.99 2188.98,15.75 2738.19,15.75 2738.19,-354.33 2657.48,-354.33 2657.48,-846.46 2297.24,-846.46 2297.24,-2298.43 2098.43,-2298.43 2098.43,-2455.91 1706.69,-2455.91 1706.69,-2298.43 1029.77,-2298.43 708.66,-2298.43 708.66,-2727.56 -70.87,-2727.56 -70.87,-688.98 -188.98,-688.98

## Other copper
Bottom Copper:
  region net GND: 1960.63,-437.01 2342.52,-437.01 2342.52,-822.83 1960.63,-822.83

## Silkscreen, mask and mechanical layers (free items; w line width, h text height)
Top Silkscreen:
  drawing of 12 lines, arcs and shapes, not listed
  text "Spinks NES PEM" at -31.5,-78.74 h47.24
  text "(Ver.A)" at 657.48,-78.74 h47.24
  text "rev .ProjectRevision" at -31.5,-157.48 h47.24
  text ".Print_Date" at -31.5,-236.22 h47.24
  text "9VAC" at 23.62,-767.72 h43.31
Bottom Silkscreen:
  drawing of 62 lines, arcs and shapes, not listed
  text "RCA_A" at 1889.76,-303.15 h39.37
  text "RCA_V" at 1614.17,-307.09 h39.37
  text "1" at 1354.33,-877.95 h43.31
  text "11" at 2007.87,-877.95 h43.31
  text "COM" at 90.55,-1362.2 h39.37
  text "COM" at 472.44,-1397.64 h39.37
  text "GND" at 1055.12,-1409.45 h39.37
  text "PS1" at 1976.38,-1464.57 h47.24
  text "PS2" at 1972.83,-1620 h47.24
  text "GND" at 795.28,-1649.61 h31.5
  text "GND" at 795.28,-1696.85 h31.5
  text "CSync" at 795.28,-1748.03 h31.5
  text "Vcc" at 1972.83,-1780 h47.24
  text "Red" at 795.28,-1799.21 h31.5
  text "Green" at 795.28,-1846.46 h31.5
  text "Blue" at 795.28,-1897.64 h31.5
  text "PA" at 1927.83,-1935 h47.24
  text "Comp" at 795.28,-1948.82 h31.5
  text "Luma" at 795.28,-2000 h31.5
  text "Chroma" at 795.28,-2047.24 h31.5
  text "PV" at 1927.83,-2080 h47.24
  text "GND" at 795.28,-2098.43 h31.5
  text "Audio" at 795.28,-2149.61 h31.5
M1 Board Outline:
  lines w7.87: -188.98,-688.98 -188.98,-334.65 -70.87,-334.65 -70.87,11.81 250,11.81 250,137.8 448.82,137.8 448.82,15.75 1133.86,15.75 1133.86,-62.99 2188.98,-62.99 2188.98,15.75 2738.19,15.75 2738.19,-354.33 2657.48,-354.33 2657.48,-846.46 2297.24,-846.46 2297.24,-2298.43 2098.43,-2298.43 2098.43,-2455.91 1706.69,-2455.91 1706.69,-2298.43 1029.77,-2298.43 708.66,-2298.43 708.66,-2727.56 -70.87,-2727.56 -70.87,-688.98 -188.98,-688.98
Mechanical 13:
  lines w7.87: -70.87,-2299.21 708.66,-2299.21
  lines w10: 2297.24,-846.46 2297.24,0 ; 2299.21,-353.54 2657.48,-353.54
Drill Drawing:
  circle w10: c-221.77,1594.81 r33.33
  circle w10: c-221.77,994.81 r20
  circle w10: c-221.77,994.81 r33.33
  lines w10: -255.11,1178.15 -188.44,1178.15 -221.77,1111.48 -255.11,1178.15 ; -255.11,1294.81 -221.77,1261.48 -188.44,1294.81 -221.77,1328.15 -255.11,1294.81 ; -255.11,1428.15 -238.44,1428.15 -221.77,1411.48 -205.11,1428.15 -188.44,1428.15 -205.11,1444.81 -188.44,1461.48 -205.11,1461.48 -221.77,1478.15 -238.44,1461.48 -255.11,1461.48 -238.44,1444.81 -255.11,1428.15 ; -255.11,1711.48 -188.44,1711.48 -188.44,1778.15 -255.11,1778.15 -255.11,1711.48 ; -255.11,1878.15 -238.44,1878.15 -238.44,1861.48 -205.11,1861.48 -205.11,1878.15 -188.44,1878.15 -188.44,1911.48 -205.11,1911.48 -205.11,1928.15 -238.44,1928.15 -238.44,1911.48 -255.11,1911.48 -255.11,1878.15 ; -255.11,2011.48 -221.77,2028.15 -188.44,2011.48 -205.11,2044.81 -188.44,2078.15 -221.77,2061.48 -255.11,2078.15 -238.44,2044.81 -255.11,2011.48 ; -255.11,2161.48 -188.44,2161.48 -188.44,2228.15 -255.11,2228.15 -255.11,2161.48 ; -255.11,2311.48 -255.11,2328.15 -238.44,2344.81 -255.11,2361.48 -255.11,2378.15 -238.44,2378.15 -221.77,2361.48 -205.11,2378.15 -188.44,2378.15 -188.44,2361.48 -205.11,2344.81 -188.44,2328.15 -188.44,2311.48 -205.11,2311.48 -221.77,2328.15 -238.44,2311.48 -255.11,2311.48 ; -255.11,2528.15 -188.44,2528.15 -221.77,2461.48 -255.11,2528.15 ; -255.11,2611.48 -221.77,2628.15 -188.44,2611.48 -205.11,2644.81 -188.44,2678.15 -221.77,2661.48 -255.11,2678.15 -238.44,2644.81 -255.11,2611.48 ; -255.11,2778.15 -238.44,2778.15 -221.77,2761.48 -205.11,2778.15 -188.44,2778.15 -205.11,2794.81 -188.44,2811.48 -205.11,2811.48 -221.77,2828.15 -238.44,2811.48 -255.11,2811.48 -238.44,2794.81 -255.11,2778.15 ; -241.77,1164.81 -201.77,1164.81 -221.77,1124.81 -241.77,1164.81 ; -241.77,1724.81 -201.77,1724.81 -201.77,1764.81 -241.77,1764.81 -241.77,1724.81 ; -241.77,2624.81 -221.77,2634.81 -201.77,2624.81 -211.77,2644.81 -201.77,2664.81 -221.77,2654.81 -241.77,2664.81 -231.77,2644.81 -241.77,2624.81 ; -241.77,2784.81 -231.77,2784.81 -221.77,2774.81 -211.77,2784.81 -201.77,2784.81 -211.77,2794.81 -201.77,2804.81 -211.77,2804.81 -221.77,2814.81 -231.77,2804.81 -241.77,2804.81 -231.77,2794.81 -241.77,2784.81
  lines w15: -314.9,916.48 4595.81,916.48 ; -314.9,2866.48 4595.81,2866.48 ; 235.98,766.48 235.98,3016.48 ; 825.82,766.48 825.82,3016.48 ; 1975.49,766.48 1975.49,3016.48 ; 2481.36,766.48 2481.36,3016.48 ; 3215.16,766.48 3215.16,3016.48 ; 3805.01,766.48 3805.01,3016.48 ; -314.9,766.48 4595.81,766.48 4595.81,3016.48 -314.9,3016.48 -314.9,766.48
  text "Symbol" at -224.9,2911.48 h72
  text "Count" at 280.98,2911.48 h72
  text "Hole Size" at 870.82,2911.48 h72
  text "Plated" at 2020.49,2911.48 h72
  text "Hole Type" at 2526.36,2911.48 h72
  text "Via/Pad" at 3260.16,2911.48 h72
  text "Pad Shape" at 3850.01,2911.48 h72
  text "101" at 280.98,2761.48 h60
  text "0.381mm (15.00mil)" at 870.82,2761.48 h60
  text "PTH" at 2020.49,2761.48 h60
  text "Round" at 2526.36,2761.48 h60
  text "Via" at 3260.16,2761.48 h60
  text "Rounded" at 3850.01,2761.48 h60
  text "3" at 280.98,2611.48 h60
  text "0.508mm (20.00mil)" at 870.82,2611.48 h60
  text "PTH" at 2020.49,2611.48 h60
  text "Round" at 2526.36,2611.48 h60
  text "Via" at 3260.16,2611.48 h60
  text "Rounded" at 3850.01,2611.48 h60
  text "19" at 280.98,2461.48 h60
  text "0.800mm (31.50mil)" at 870.82,2461.48 h60
  text "PTH" at 2020.49,2461.48 h60
  text "Round" at 2526.36,2461.48 h60
  text "Pad" at 3260.16,2461.48 h60
  text "(Mixed)" at 3850.01,2461.48 h60
  text "33" at 280.98,2311.48 h60
  text "0.900mm (35.43mil)" at 870.82,2311.48 h60
  text "PTH" at 2020.49,2311.48 h60
  text "Round" at 2526.36,2311.48 h60
  text "Pad" at 3260.16,2311.48 h60
  text "(Mixed)" at 3850.01,2311.48 h60
  text "2" at 280.98,2161.48 h60
  text "1.000mm (39.37mil)" at 870.82,2161.48 h60
  text "PTH" at 2020.49,2161.48 h60
  text "Slot" at 2526.36,2161.48 h60
  text "Pad" at 3260.16,2161.48 h60
  text "Rounded" at 3850.01,2161.48 h60
  text "1" at 280.98,2011.48 h60
  text "1.000mm (39.37mil)" at 870.82,2011.48 h60
  text "PTH" at 2020.49,2011.48 h60
  text "Slot" at 2526.36,2011.48 h60
  text "Pad" at 3260.16,2011.48 h60
  text "Rectangle" at 3850.01,2011.48 h60
  text "1" at 280.98,1861.48 h60
  text "1.000mm (39.37mil)" at 870.82,1861.48 h60
  text "PTH" at 2020.49,1861.48 h60
  text "Slot" at 2526.36,1861.48 h60
  text "Pad" at 3260.16,1861.48 h60
  text "Rectangle" at 3850.01,1861.48 h60
  text "4" at 280.98,1711.48 h60
  text "1.200mm (47.24mil)" at 870.82,1711.48 h60
  text "PTH" at 2020.49,1711.48 h60
  text "Round" at 2526.36,1711.48 h60
  text "Pad" at 3260.16,1711.48 h60
  text "Octagonal" at 3850.01,1711.48 h60
  text "2" at 280.98,1561.48 h60
  text "1.300mm (51.18mil)" at 870.82,1561.48 h60
  text "PTH" at 2020.49,1561.48 h60
  text "Slot" at 2526.36,1561.48 h60
  text "Pad" at 3260.16,1561.48 h60
  text "Rounded" at 3850.01,1561.48 h60
  text "6" at 280.98,1411.48 h60
  text "1.800mm (70.87mil)" at 870.82,1411.48 h60
  text "PTH" at 2020.49,1411.48 h60
  text "Round" at 2526.36,1411.48 h60
  text "Pad" at 3260.16,1411.48 h60
  text "(Mixed)" at 3850.01,1411.48 h60
  text "3" at 280.98,1261.48 h60
  text "2.200mm (86.61mil)" at 870.82,1261.48 h60
  text "PTH" at 2020.49,1261.48 h60
  text "Round" at 2526.36,1261.48 h60
  text "Pad" at 3260.16,1261.48 h60
  text "Octagonal" at 3850.01,1261.48 h60
  text "1" at 280.98,1111.48 h60
  text "2.800mm (110.24mil)" at 870.82,1111.48 h60
  text "NPTH" at 2020.49,1111.48 h60
  text "Round" at 2526.36,1111.48 h60
  text "Pad" at 3260.16,1111.48 h60
  text "Rounded" at 3850.01,1111.48 h60
  text "2" at 280.98,961.48 h60
  text "3.500mm (137.79mil)" at 870.82,961.48 h60
  text "NPTH" at 2020.49,961.48 h60
  text "Round" at 2526.36,961.48 h60
  text "Pad" at 3260.16,961.48 h60
  text "Rounded" at 3850.01,961.48 h60
  text "178 Total" at 280.98,811.48 h60
  text "Slot definitions :" at -224.9,666.51 h60
  text "Routed Path Length" at 807.79,666.51 h60
  text "= Calculated from tool start centre position to tool end centre position." at 1910.46,666.51 h60
  text "Hole Length" at 807.79,566.53 h60
  text "= Routed Path Length + Tool Size = Slot length as defined in the PCB layout" at 1500.59,566.53 h60

## Text inside footprints (layer, text, board x,y; h text height)
C7: Top Silkscreen "+" at 2177.17,-791.34 h59.06 r90
C8: Bottom Silkscreen "+" at 1696.85,-2228.35 h59.06 r180
D1: Top Silkscreen "~" at 803.15,-397.64 h98.43 r180; Top Silkscreen "-" at 964.57,-625.98 h50; Top Silkscreen "+" at 763.78,-625.98 h50; Top Silkscreen "~" at 1003.94,-397.64 h98.43 r180
J3: Bottom Silkscreen "1" at 1000,-2255.91 h43.31 r270
J3A: Bottom Silkscreen "1" at 842.52,-2196.85 h43.31 r270
J4: Bottom Silkscreen "1" at 562.99,-1255.91 h43.31 r90
J6: Top Silkscreen "11" at 1988.19,-862.2 h50; Top Silkscreen "1" at 1318.9,-866.14 h50